# Altium PCB PCB1.PcbDoc
Units mm, origin at the board's own origin, x right, y up, seen from the top; angles counter-clockwise.
Board outline 82.04 x 50.16 mm, 2 copper layers (Top Layer, Bottom Layer); 57 components, 31 nets, 123 pads, 0 vias.
Unrouted connection lines stored in the file: 2.
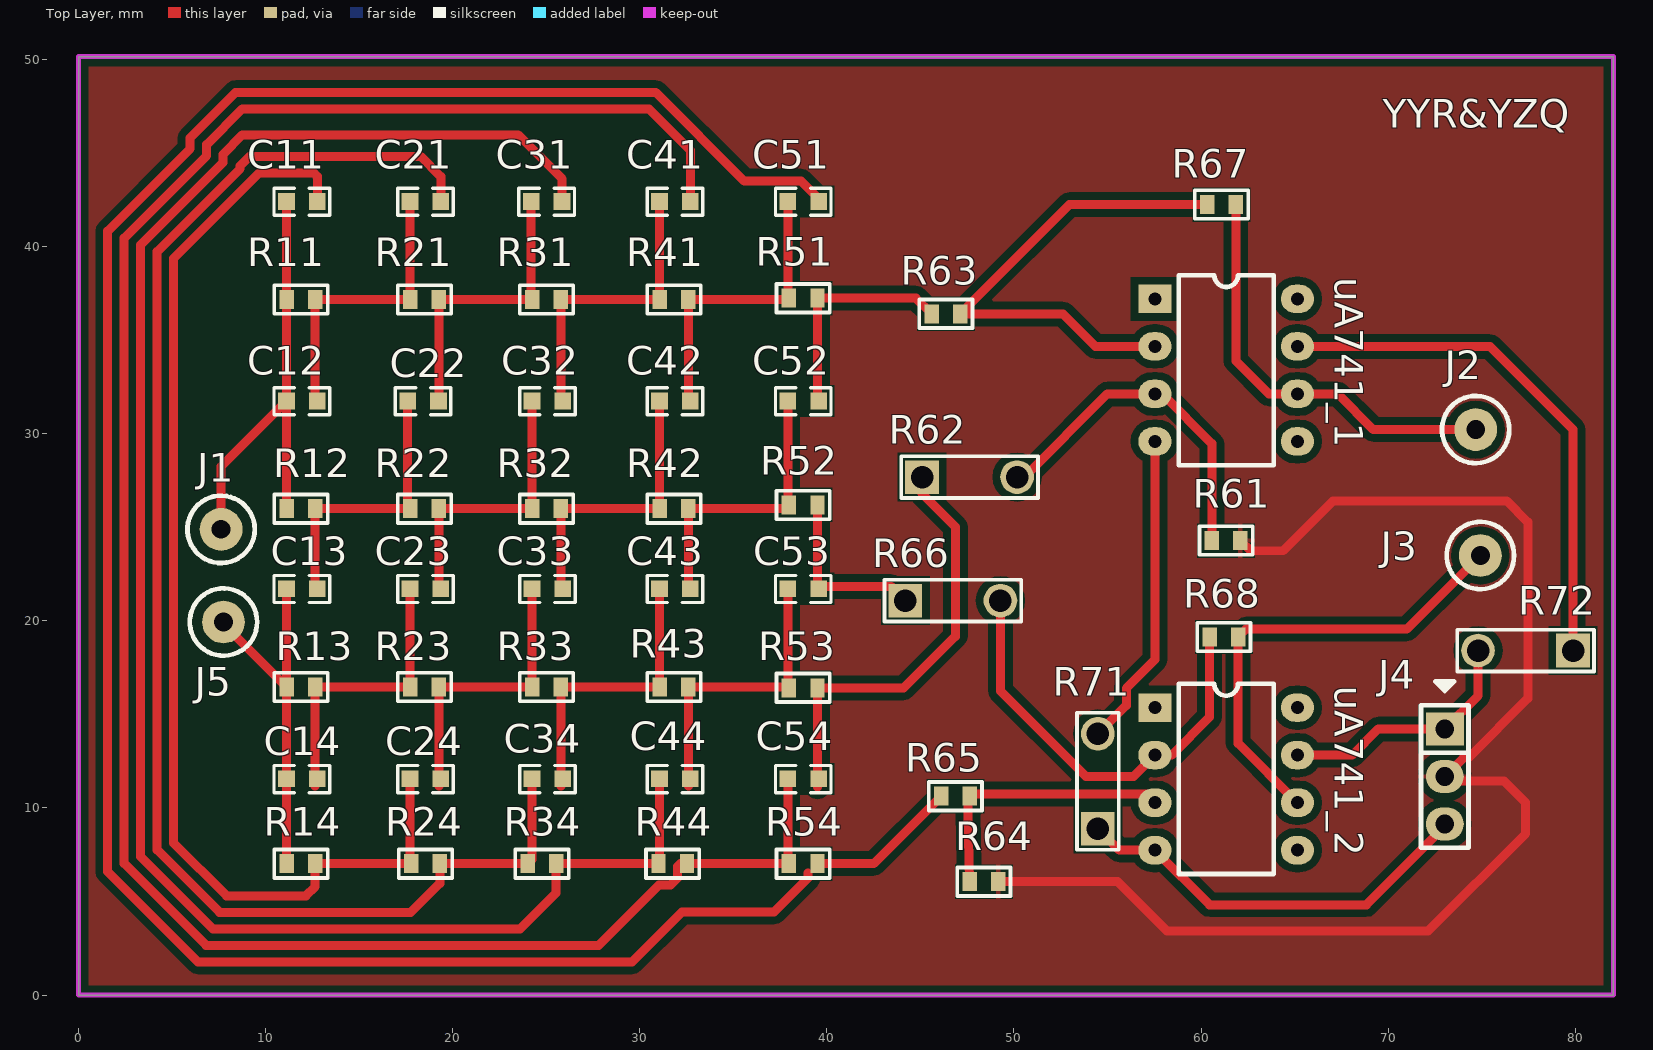
[diagram p0: Top Layer view]
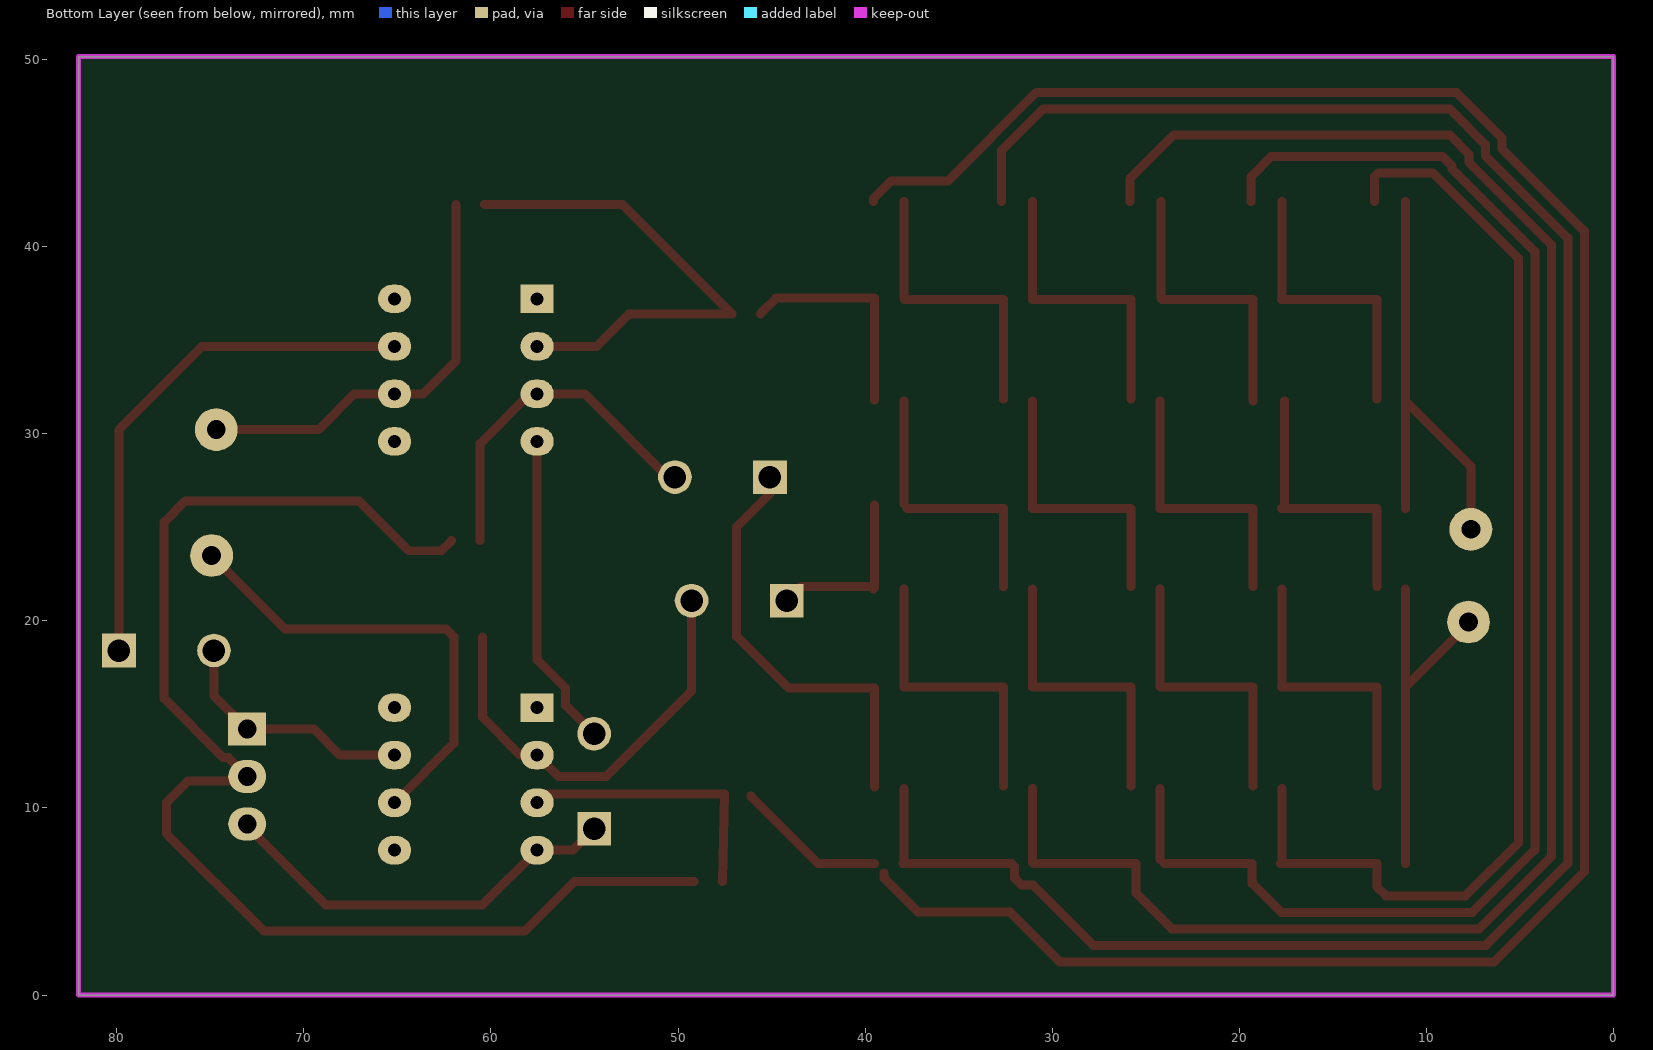
[diagram p1: Bottom Layer view, seen from below]

## Layer stack, top to bottom
Top Layer: signal copper 0.0356
Dielectric: dielectric 0.32, FR-4, Dk 4.8
Bottom Layer: signal copper 0.0356

## Board outline
0,0 0,50.165 82.042,50.165 82.042,0

## Design rules (kind name [scope] priority, off if disabled: settings)
Clearance [All] p1: gap=0.4
PolygonConnect [All] p1: connectstyle=Relief reliefconductorwidth=0.254 reliefentries=4 polygonreliefangle="90 Angle"
RoutingVias [All] p1: holewidth=0.711 width=1.27 viastyle="Through Hole" minholewidth=0.711 minwidth=1.27 maxholewidth=0.711 maxwidth=1.27
SilkscreenOverComponentPads [All] p1: minsilkscreentomaskgap=0.254
SolderMaskExpansion [All] p1: expansion=0.102
Width Width_1 [All] p1: maxlimit=0.48 minlimit=0.48 preferedwidth=0.48
Width [All] p2: maxlimit=0.254 minlimit=0.254 preferedwidth=0.254
27 further rules are at their usual default settings.

## Components (designator, comment, footprint, x,y, rotation, side; value= is the part's Value field where it differs from the comment)
C11 "0.01uF" 0603C 11.938,42.418 r0 top
C12 "0.01uF" 0603C 11.938,31.75 r0 top
C13 "0.01uF" 0603C 11.938,21.717 r0 top
C14 "0.01uF" 0603C 11.938,11.557 r0 top
C21 "0.01uF" 0603C 18.542,42.418 r0 top
C22 "0.01uF" 0603C 18.415,31.75 r0 top
C23 "0.01uF" 0603C 18.542,21.717 r0 top
C24 "0.01uF" 0603C 18.542,11.557 r0 top
C31 "0.01uF" 0603C 25.019,42.418 r0 top
C32 "0.01uF" 0603C 25.063,31.75 r0 top
C33 "0.01uF" 0603C 25.063,21.717 r0 top
C34 "0.01uF" 0603C 25.063,11.557 r0 top
C41 "0.01uF" 0603C 31.877,42.418 r0 top
C42 "0.01uF" 0603C 31.877,31.75 r0 top
C43 "0.01uF" 0603C 31.877,21.717 r0 top
C44 "0.01uF" 0603C 31.877,11.557 r0 top
C51 "0.01uF" 0603C 38.735,42.418 r0 top
C52 "0.01uF" 0603C 38.735,31.75 r0 top
C53 "0.01uF" 0603C 38.735,21.717 r0 top
C54 "0.01uF" 0603C 38.735,11.557 r0 top
J1 "CON1" PIN-1-1.0 7.62,24.892 r0 top
J2 "CON1" PIN-1-1.0 74.676,30.226 r0 top
J3 "CON1" PIN-1-1.0 74.93,23.495 r0 top
J4 "CON3" PIN-3-2.54-1.0 73.025,11.684 r270 top
J5 "CON1" PIN-1-1.0 7.747,19.939 r0 top
R11 "51K" 0603R 11.122,37.211 r0 top
R12 "51K" 0603R 11.122,26.035 r0 top
R13 "51K" 0603R 11.122,16.51 r0 top
R14 "51K" 0603R 11.122,7.061 r0 top
R21 "30K" 0603R 17.726,37.211 r0 top
R22 "30K" 0603R 17.726,26.035 r0 top
R23 "30K" 0603R 17.726,16.51 r0 top
R24 "30K" 0603R 17.78,7.061 r0 top
R31 "16.8K" 0603R 24.247,37.211 r0 top
R32 "16.8K" 0603R 24.247,26.035 r0 top
R33 "16.8K" 0603R 24.247,16.51 r0 top
R34 "16.8K" 0603R 24.003,7.061 r0 top
R41 "8.8K" 0603R 31.061,37.211 r0 top
R42 "8.8K" 0603R 31.061,26.035 r0 top
R43 "8.8K" 0603R 31.061,16.51 r0 top
R44 "8.8K" 0603R 30.988,7.061 r0 top
R51 "5.6K" 0603R 39.497,37.211 r180 top
R52 "5.6K" 0603R 39.497,26.162 r180 top
R53 "5.6K" 0603R 39.497,16.383 r180 top
R54 "5.6K" 0603R 39.497,6.985 r180 top
R61 "100k" 0603R 62.103,24.257 r180 top
R62 "100k" Inductor2 45.085,27.686 r0 top
R63 "100k" 0603R 45.593,36.449 r0 top
R64 "100k" 0603R 47.625,6.096 r0 top
R65 "100k" 0603R 46.101,10.668 r0 top
R66 "100k" Inductor2 44.196,21.082 r0 top
R67 "100k" 0603R 60.325,42.291 r0 top
R68 "100k" 0603R 60.452,19.177 r0 top
R71 "0R" Inductor2 54.483,8.89 r90 top
R72 "0R" Inductor2 79.883,18.415 r180 top
uA741_1 "uA741" DIP-8 61.341,33.401 r270 top
uA741_2 "uA741" DIP-8 61.341,11.557 r270 top

## Footprints (in the part's own frame and the unit in brackets; to place one, negate y for a bottom-side part, rotate by r counter-clockwise, add the part's x,y. Pads: shape width x height; smd on the part's side, far side on the other; paste and mask are expansions set on the pad)
0603C [mil]
  rect 35x35 smd: 1(-32.5,0) 2(32.5,0)
  silkscreen extent -58,-29 58,28
0603R [mil]
  rect 30x40 smd: 1(0.2,-1.48) 2(60.2,-1.48)
  silkscreen extent -26,-32 86,29
DIP-8 [mil] "Dual In-line Package, 8PIN"
  rect 60x70 hole 27.56: 1(-150,-150)
  oval 60x70 hole 27.56: 2(-50,-150) 3(50,-150) 4(150,-150) 5(150,150) 6(50,150) 7(-50,150) 8(-150,150)
  silkscreen extent -200,-100 200,100, body extent -195,-154 195,154, height 180
Inductor2 [mm]
  rect 1.8x1.8 hole 1.2: 1(0,0)
  round 1.8 hole 1.2: 2(5.08,0)
  silkscreen extent -1.12,-1.12 6.2,1.12
PIN-1-1.0 [mil] "Pi"
  round 90 hole 39.37: 1(0,0)
  silkscreen extent -71,-71 71,71, body extent -50,-50 50,50, height 398
PIN-3-2.54-1.0 [mil] "Pi"
  rect 70x80 hole 39.37: 1(-100,0)
  oval 70x80 hole 39.37: 2(0,0) 3(100,0)
  silkscreen extent -200,-50 150,50, body extent -150,-50 150,50, height 398

## Part data
C11 C12 C13 C14 C21 C22 C23 C24 C31 C32 C33 C34 C41 C42 C43 C44 C51 C52 C53 C54: library part Cap, "Capacitor"
R11 R12 R13 R14 R21 R22 R23 R24 R31 R32 R33 R34 R41 R42 R43 R44 R51 R52 R53 R54: library part Res2, "Resistor"
R61 R62 R63 R64 R65 R66 R67 R68 R71 R72: library part RES, "Resistor"

## Nets (pads, with @x,y where several pads share a name; then routed paths per layer and width w, separated by ;. In a path a pad name is that pad's centre, name@x,y a point inside that pad or via, vN(x,y) a via of type N, cw(c..) or ccw(c..) an arc to the next point about the centre after c; other vN are vias at no path point)
GND: J4.2 R61.1 R64.2 | length 70.4
  Top Layer w0.48: R64.2 55.537,6.058 58.166,3.429 72.136,3.429 77.343,8.636 77.343,10.287 76.2,11.43 J4.2@73.279,11.43 ; R61.1 62.643,23.749 64.389,23.749 67.056,26.416 76.327,26.416 77.47,25.273 77.47,15.859 74.306,12.695 74.036,12.695 J4.2
NetC11_1: C11.1 C12.1 J1.1 R11.1 R12.1 | length 24.7
  Top Layer w0.48: J1.1 7.62,28.258 C12.1 R12.1@11.112,26.012 ; R11.1@11.112,37.188 C11.1 ; C12.1@11.127,31.765 R11.1
NetC11_2: C11.2 C24.1 R14.2 R24.1 | length 61.5
  Top Layer w0.48: C11.2 12.763,43.752 12.564,43.951 9.661,43.951 5.08,39.37 5.08,8.128 7.91,5.298 12.156,5.298 12.651,5.793 R14.2 R24.1 ; R24.1@17.716,7.092 17.716,11.049
NetC12_2: C12.2 C21.1 R11.2 R21.1 | length 15.6
  Top Layer w0.48: C12.2@12.651,31.862 R11.2 R21.1@17.716,37.173 ; C21.1 R21.1@17.716,37.173 ; R21.1 R21.1@17.716,37.173
NetC13_1: C13.1 C14.1 J5.1 R13.1 R14.1 | length 19.6
  Top Layer w0.48: J5.1 7.747,19.853 R13.1@11.112,16.487 ; C13.1 R13.1@11.112,16.487 ; R14.1 11.112,7.038 11.112,11.049 11.127,11.064 R13.1 R13.1@11.112,16.487
NetC13_2: C13.2 C22.1 R12.2 R22.1 | length 14.9
  Top Layer w0.48: C13.2@12.651,21.829 R12.2 R22.1 ; R22.1@17.59,26.139 C22.1
NetC14_2: C14.2 C23.1 R13.2 R23.1 | length 15.6
  Top Layer w0.48: C14.2@12.651,11.161 R13.2 R23.1 ; R23.1@17.716,16.487 C23.1
NetC21_2: C21.2 C34.1 R24.2 R34.1 | length 77.8
  Top Layer w0.48: C21.2 19.367,43.752 18.288,44.831 9.144,44.831 8.636,44.323 8.636,44.171 4.2,39.735 4.2,7.763 7.546,4.418 17.753,4.418 19.309,5.974 R24.2 R34.1 ; R34.1@24.237,7.252 24.237,11.049
NetC22_2: C22.2 C31.1 R21.2 R31.1 | length 15.5
  Top Layer w0.48: C22.2@19.255,31.765 R21.2 R31.1@24.135,37.173 ; R31.1@24.194,37.232 C31.1
NetC23_2: C23.2 C32.1 R22.2 R32.1 | length 14.9
  Top Layer w0.48: C23.2@19.255,21.829 R22.2 R32.1@24.222,25.997 ; R32.1@24.237,26.012 C32.1
NetC24_2: C24.2 C33.1 R23.2 R33.1 | length 15.5
  Top Layer w0.48: C24.2@19.255,11.161 R23.2 R33.1@24.222,16.472 ; R33.1@24.237,16.487 C33.1
NetC31_2: C31.2 C44.1 R34.2 R44.1 | length 95.7
  Top Layer w0.48: C31.2 25.845,43.624 23.495,45.974 8.763,45.974 7.729,44.94 7.729,44.508 3.32,40.099 3.32,7.399 7.181,3.538 23.604,3.538 25.532,5.466 R34.2 R44.1 ; R44.1@31.051,7.082 31.051,11.049
NetC32_2: C32.2 C41.1 R31.2 R41.1 | length 15.8
  Top Layer w0.48: C32.2@25.776,31.862 R31.2 R41.1 ; R41.1@31.051,37.188 C41.1
NetC33_2: C33.2 C42.1 R32.2 R42.1 | length 15.2
  Top Layer w0.48: C33.2@25.776,21.829 R32.2 R42.1 ; R42.1@31.051,26.012 C42.1
NetC34_2: C34.2 C43.1 R33.2 R43.1 | length 15.8
  Top Layer w0.48: C34.2@25.776,11.161 R33.2 R43.1 ; R43.1@31.051,16.487 C43.1
NetC41_2: C41.2 C54.1 R44.2 R54.2 | length 114
  Top Layer w0.48: C41.2 32.703,45.148 30.48,47.371 8.763,47.371 6.849,45.457 6.849,44.873 2.44,40.464 2.44,7.034 6.816,2.658 27.804,2.658 31.021,5.875 31.639,5.875 32.014,6.25 32.014,6.868 32.169,7.023 R44.2 R54.2 ; R54.2@37.91,7.081 37.91,11.049
NetC42_2: C42.2 C51.1 R41.2 R51.2 | length 15.7
  Top Layer w0.48: C42.2@32.59,31.862 R41.2 R51.2@37.893,37.173 ; R51.2@37.91,37.307 C51.1
NetC43_2: C43.2 C52.1 R42.2 R52.2 | length 14.8
  Top Layer w0.48: C43.2@32.59,21.829 R42.2 R52.2@37.766,25.997 ; R52.2@37.91,26.258 C52.1
NetC44_2: C44.2 C53.1 R43.2 R53.2 | length 15.9
  Top Layer w0.48: C44.2@32.59,11.161 R43.2 R53.2@37.916,16.472 ; R53.2@37.91,16.479 C53.1
NetC51_2: C51.2 R54.1 R65.1 | length 127.8
  Top Layer w0.48: 38.989,6.519 38.989,6.249 37.184,4.445 32.258,4.445 29.591,1.778 6.375,1.778 1.56,6.593 1.56,40.828 5.969,45.237 5.969,45.822 8.398,48.251 30.845,48.251 35.593,43.502 38.619,43.502 39.56,42.561 C51.2 ; R54.1 42.498,7.023 R65.1
NetC52_2: C52.2 R51.1 R63.1 | length 11.9
  Top Layer w0.48: C52.2@39.492,31.819 R51.1 44.761,37.249 R63.1
NetC53_2: C53.2 R52.1 R66.1 | length 9.4
  Top Layer w0.48: C53.2@39.492,21.786 R52.1 ; C53.2 39.688,21.844 43.434,21.844 R66.1
NetC54_2: C54.2 R53.1 R62.1 | length 23.1
  Top Layer w0.48: C54.2@39.492,11.118 R53.1 44.107,16.421 46.863,19.177 46.863,25.019 45.085,26.797 R62.1
NetR61_2: R61.2 R62.2 uA741_1.3 | length 18.5
  Top Layer w0.48: R62.2 50.546,27.686 54.991,32.131 uA741_1.3 57.912,32.131 60.574,29.469 R61.2
NetR63_2: R63.2 R67.1 uA741_1.2 | length 26.8
  Top Layer w0.48: uA741_1.2 54.356,34.671 52.616,36.411 R63.2 52.964,42.253 R67.1
NetR64_1: R64.1 R65.2 uA741_2.3 | length 14.3
  Top Layer w0.48: R64.1 47.503,10.757 uA741_2.3@57.061,10.757
NetR66_2: R66.2 R68.1 uA741_2.2 | length 23.5
  Top Layer w0.48: R66.2 49.276,16.256 53.848,11.684 56.388,11.684 uA741_2.2 58.42,12.827 60.457,14.864 R68.1
V+: J4.1 R72.1 R72.2 uA741_1.7 uA741_2.7 | length 41.8
  Top Layer w0.48: uA741_2.7 68.072,12.827 69.469,14.224 J4.1 74.803,16.002 R72.2 ; uA741_1.7 75.438,34.671 79.883,30.226 R72.1
V-: J4.3 R71.1 R71.2 uA741_1.4 uA741_2.4 | length 39.2
  Top Layer w0.48: R71.1 55.626,7.747 uA741_2.4 ; R71.2 56.002,15.489 56.002,16.394 57.531,17.923 uA741_1.4 ; uA741_2.4@57.531,7.366 uA741_2.4 ; J4.3@73.025,9.017 68.834,4.826 60.452,4.826 uA741_2.4
VOUT1: J2.1 R67.2 uA741_1.6 | length 22.7
  Top Layer w0.48: R67.2 61.854,33.904 63.627,32.131 uA741_1.6 67.31,32.131 69.215,30.226 J2.1
VOUT2: J3.1 R68.2 uA741_2.6 | length 24.9
  Top Layer w0.48: uA741_2.6 61.981,13.457 R68.2 62.4,19.558 70.993,19.558 J3.1
pads on no net: uA741_1.1 uA741_1.5 uA741_1.8 uA741_2.1 uA741_2.5 uA741_2.8

## Polygon pours and split planes (outlines as drawn)
GND on Top Layer "Top Layer-No Net" (solid, remove dead copper, pour order 2): 38.481,53.467 39.497,52.451 84.709,52.451 84.709,-6.604 82.296,-9.017 76.581,-3.302 -8.382,-3.302 -8.382,49.022 -3.175,54.229

## Keep-outs
Keep-Out Layer:
  the board outline again, w0.254

## Silkscreen, mask and mechanical layers (free items; w line width, h text height)
Top Overlay:
  text "YYR&YZQ" at 69.723,46.355 h1.52